# Altium PCB CH340C9T-R0.PcbDoc
Units mil, origin at the board's own origin, x right, y up, seen from the top; angles counter-clockwise.
Board outline 574.6 x 1292.24 mil, 2 copper layers (Top Layer, Bottom Layer); 12 components, 16 nets, 52 pads, 66 vias.
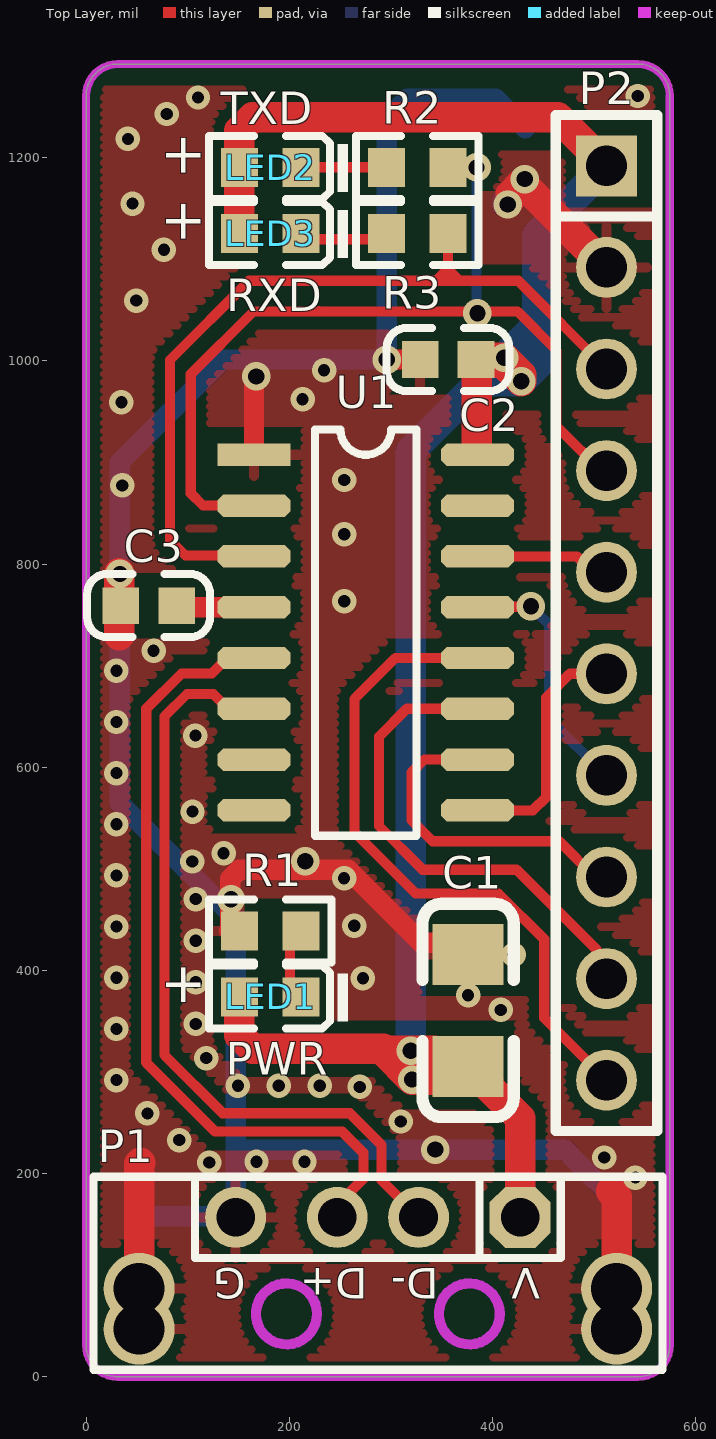
[diagram p0: Top Layer view]
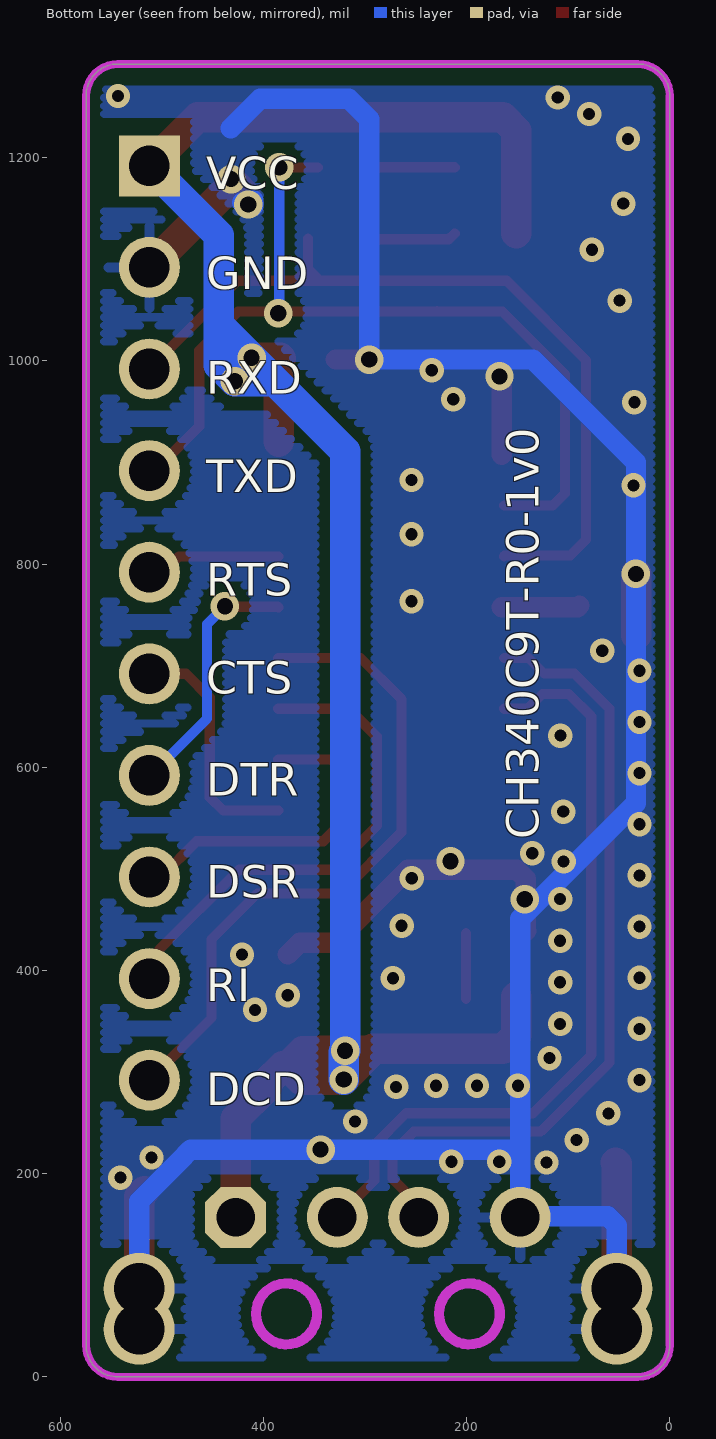
[diagram p1: Bottom Layer view, seen from below]

## Layer stack, top to bottom
Top Solder: solder mask 0.4, Solder Resist, Dk 3.5
Top Layer: signal copper 1.4
Dielectric 1: dielectric 12.6, FR-4, Dk 4.8
Bottom Layer: signal copper 1.4
Bottom Solder: solder mask 0.4, Solder Resist, Dk 3.5

## Board outline
0,31.5 0,1260.75 cw(c31.5,1260.75) 31.5,1292.24 543.11,1292.24 cw(c543.11,1260.75) 574.6,1260.75 574.6,31.5 cw(c543.11,31.5) 543.11,0 31.5,0 cw(c31.5,31.5)

## Design rules (kind name [scope] priority, off if disabled: settings)
Clearance Clearance_1 [InPolygon] p1: gap=10 ignorepadtopadclearanceinfootprint=FALSE
Clearance [All] p2: gap=8 ignorepadtopadclearanceinfootprint=FALSE
ComponentClearance [All] p1 off: gap=10 collisioncheckmode=3 verticalgap=10 showdistances=FALSE
MinimumSolderMaskSliver [All] p1 off: minsoldermaskwidth=10
PolygonConnect PolygonConnect_1 [IsVia] p1: connectstyle=Direct reliefconductorwidth=10 reliefentries=4 polygonreliefangle="90 Angle" airgapwidth=10
PolygonConnect [All] p2: connectstyle=Relief reliefconductorwidth=10 reliefentries=4 polygonreliefangle="90 Angle" airgapwidth=10
RoutingVias [All] p1: holewidth=28 width=50 viastyle="Through Hole" minholewidth=12 minwidth=24 maxholewidth=16 maxwidth=28
SilkToSilkClearance [All] p1 off: silktosilkclearance=10
SilkToSolderMaskClearance [IsPad] p1 off: minsilkscreentomaskgap=10 clearancetoexposedcopper=TRUE
SolderMaskExpansion [All] p1: expansion=4 istentingtop=FALSE
Width [All] p1: maxlimit=60 minlimit=8 preferedwidth=10
26 further rules are at their usual default settings.

## Components (designator, comment, footprint, x,y, rotation, side; value= is the part's Value field where it differs from the comment)
C1 "10uF" 3216_C 376.07,305.7 r270 top
C2 "0.1uF" 0603_C 383.83,1001.38 r180 top
C3 "0.1uF" 0603_C 34.11,759.23 r0 top
LED1 "PWR" 0603+ 151.01,374.03 r0 top
LED2 "TXD" 0603+ 151.01,1190.5 r0 top
LED3 "RXD" 0603+ 151.01,1125.5 r0 top
P1 "USB" USBAM 427.28,157.03 r180 top
P2 "Header 10H" SIP10-2.54mm 512.28,1192.03 r0 top
R1 "2K" 0603 211.64,439.03 r180 top
R2 "2K" 0603 295.64,1190.5 r0 top
R3 "2K" 0603 295.64,1125.5 r0 top
U1 "CH340C" SOP16 165.35,907.63 r270 top

## Footprints (in the part's own frame and the unit in brackets; to place one, negate y for a bottom-side part, rotate by r counter-clockwise, add the part's x,y. Pads: shape width x height; smd on the part's side, far side on the other; paste and mask are expansions set on the pad)
0603 [mm]
  rect 0.93x0.98 smd: 1(0,0) 2(1.54,0)
  silkscreen extent -0.76,-0.79 2.3,0.79
0603+ [mm]
  rect 0.93x0.98 smd: 1(0,0) 2(1.54,0)
  silkscreen extent -0.76,-0.79 2.72,0.79
0603_C [mil]
  rect 36x36 smd: 1(0,0) 2(55,0)
  silkscreen extent -33,-31 88,31
3216_C [mil]
  rect 60x70 smd: 1(0,0) 2(-110,0)
  silkscreen extent -160,-45 50,45
SIP10-2.54mm [mil]
  rect 60x60 hole 40: 1(0,0)
  round 60 hole 40: 2(0,-100) 3(0,-200) 4(0,-300) 5(0,-400) 6(0,-500) 7(0,-600) 8(0,-700) 9(0,-800) 10(0,-900)
  silkscreen extent -50,-950 50,50
SOP16 [mil]
  rect 22x72 smd: 1(0,0)
  oct 22x72 smd: 2(50,0) 3(100,0) 4(150,0) 5(200,0) 6(250,0) 7(300,0) 8(350,0) 9(350,220) 10(300,220) 11(250,220) 12(200,220) 13(150,220) 14(100,220) 15(50,220) 16(0,220)
  silkscreen extent -25,60 375,160
USBAM [mil]
  oct 60x60 hole 38: 1(0,0)
  round 60 hole 38: 2(100,0) 3(180,0) 4(280,0)
  round 70 hole 50: 5(-95,70) 5(-95,110) 6(375,70) 6(375,110)
  Keep-Out Layer circle w10: c230,95 r30
  Keep-Out Layer circle w10: c50,95 r30
  silkscreen extent -140,-40 420,150

## Part data
C1 C2 C3: library part CAP, "Capacitor"
LED1 LED2 LED3: library part LED2, "Typical RED, GREEN, YELLOW, AMBER GaAs LED"
P2: "Header, 10-Pin, Right Angle", LatestRevisionDate=17-Jul-2002, LatestRevisionNote="Re-released for DXP Platform.", Publisher="Altium Limited"
R1 R2 R3: library part Res2, "Resistor"
U1: "USB to TTL Serial / UART"

## Via types
v1: diameter 24, hole 12, Top Layer to Bottom Layer, 51 vias
v2: diameter 28, hole 16, Top Layer to Bottom Layer, 15 vias

## Nets (pads, with @x,y where several pads share a name; then routed paths per layer and width w, separated by ;. In a path a pad name is that pad's centre, name@x,y a point inside that pad or via, vN(x,y) a via of type N, cw(c..) or ccw(c..) an arc to the next point about the centre after c; other vN are vias at no path point)
CTS: P2.6 U1.9 | length 240
  Top Layer w10: U1.9 439.84,557.63 452.83,570.62 452.83,668.59 476.27,692.03 P2.6
DCD: P2.10 U1.12 | length 663.7
  Top Layer w10: U1.12 304.47,707.63 264.23,667.39 264.23,536.02 324.4,475.85 405.95,475.85 451.05,430.75 451.05,353.27 P2.10
DSR: P2.8 U1.10 | length 332.4
  Top Layer w10: U1.10 333.17,607.63 320.21,594.67 320.21,548.11 341.09,527.23 465.64,527.23 500.83,492.03 P2.8
DTR: P2.7 U1.13 | length 250.8
  Top Layer w10: U1.13 385.85,758.13 437.37,758.13 v2(437.87,758.63)
  Bottom Layer w10: v2(437.87,758.63) 455.57,740.93 455.57,647.91 511.44,592.03 P2.7
GND: C1.2 C2.2 C3.1 P1.4 P1.5 P1.6 P2.2 R1.2 U1.1 | length 3176.9
  Top Layer w20: C3.1@31.95,757.07 C3.1 33.73,759.61 33.73,789.96 v2(33.35,790.33) ; R1.2@141.01,439.03 141.87,439.89 141.87,490.36 150.65,499.15 258.06,499.15 329.85,427.35 364.41,427.35 C1.2 ; U1.1 165.35,980.3 167.64,982.58 v2(167.64,984.75) ; v2(295.9,1001.38) C2.2 ; v2@421,1155.96 416.52,1155.96 412.92,1152.36 412.92,1165.77 v2@425.73,1178.58
  Top Layer w30: 32.95,729.98 v2@32.95,791.07 ; P1.6@52.28,47.03 52.28,87.03 52.28,209.79 53.28,210.79 ; v2@431.84,1172.48 P2.2 ; 517.14,182.55 522.28,177.41 P1.5@522.28,87.03
  Bottom Layer w20: P1.6@52.28,47.03 52.28,87.03 52.28,149.12 61.22,158.06 146.26,158.06 P1.4 147.28,223.46 ; v2@409.86,1158.02 409.86,1152.36 413.46,1155.96 v2@421,1155.96 ; 432.3,1229.03 412.58,1248.75 403.21,1258.12 315.98,1258.12 295.9,1238.04 v2(295.9,1001.38) 134.61,1001.38 33.35,900.12 v2(33.35,790.33) 33.35,564.8 147.28,450.87 147.28,286.65 147.28,223.46 ; P1.5@522.28,47.03 522.28,87.03 522.28,172.95 482.75,212.48 471.77,223.46 343.73,223.46 147.28,223.46
  other v1: 540.75,196.2 121.33,211.11 167.81,211.83 215.01,211.83 510.13,215.98 91.78,233.09 309.71,251.43 60.43,259.39 269.43,285.45 149.53,286.65 189.76,286.65 229.98,286.65 29.89,292.18 118.42,313.85 29.89,342.54 107.96,347.48 408.25,361.29 376.07,375.7 107.96,388.41 272.55,392.44 29.89,392.89 421.07,415.7 107.96,429.34 29.89,443.25 264,444.09 107.96,470.27 254.02,490.76 29.89,493.6 104.51,507.31 135.39,515.34 29.89,543.95 104.86,556.42 29.89,594.31 107.65,631.27 29.89,644.66 29.89,695.02 66.52,714.77 254.19,763.54 254.19,829.37 35.75,877.5 254.19,882.79 34.84,959.34 213.2,962.29 234.32,990.86 49.39,1059.37 76.67,1109.39 45.75,1154.86 41.2,1218.51 79.4,1243.06 110.25,1259.23 543.11,1260.75
  other v2: 343.73,223.79 142.72,470.09 215.87,507.59 415,1153.96 431.84,1179.04
NetLED1_2: LED1.2 R1.1 | length 65
  Top Layer w10: LED1.2@200.64,372.03 R1.1@200.64,437.03
NetLED2_2: LED2.2 R2.1 | length 84.2
  Top Layer w10: LED2.2 211.85,1190.71 295.43,1190.71 R2.1
NetLED3_2: LED3.2 R3.1 | length 88.8
  Top Layer w10: LED3.2 217.43,1119.71 289.85,1119.71 R3.1
RI: P2.9 U1.11 | length 493.5
  Top Layer w10: U1.11 315.82,657.63 288.29,630.11 288.29,542.32 331.41,499.2 423.87,499.2 502.71,420.36 502.71,401.6 P2.9
RTS: P2.5 U1.14 | length 133.4
  Top Layer w10: U1.14 483.15,807.63 498.75,792.03 P2.5
RXD: P2.3 R3.2 U1.3 | length 832.8
  Top Layer w10: U1.3@163.35,807.63 162.49,808.49 97.93,808.49 82.65,823.77 82.65,1000.95 160.54,1078.85 344.45,1078.85 ; 356.27,1082.86 356.27,1090.15 ; R3.2@356.27,1120.5 356.27,1090.66 ; P2.3 425.47,1078.85 367.57,1078.85 ; 344.45,1078.85 357.57,1078.85 367.57,1078.85 ; 344.45,1078.85 356.27,1090.66 ; 356.27,1090.15 356.27,1090.66 ; 356.27,1090.15 367.57,1078.85
TXD: P2.4 R2.2 U1.2 | length 908.8
  Top Layer w10: U1.2@163.35,857.63 115.21,857.63 103.16,869.68 103.16,986.92 164.85,1048.6 228.85,1048.6 229.28,1049.03 229.71,1048.6 424.79,1048.6 463.12,1010.28 463.12,935.76 P2.4@509.56,889.31 ; R2.2@346.27,1190.5 R2.2 v2(384.39,1190.5)
  Bottom Layer w10: v2@382.42,1047.03 v2@384.39,1047.03 ; v2(384.39,1190.5) v2@384.39,1047.03 ; v2(385.28,1047.03) v2@384.39,1047.03
UD+: P1.3 U1.5 | length 797.7
  Top Layer w10: U1.5@163.35,707.63 139.01,707.63 123.77,692.38 94.08,692.38 59.32,657.63 59.32,309.32 127.17,241.47 252.17,241.47 272.96,220.68 272.96,195.03 247.28,169.35 P1.3
UD-: P1.2 U1.6 | length 771.1
  Top Layer w10: U1.6@163.35,657.63 139.84,657.63 125.24,672.23 99.38,672.23 77.32,650.17 77.32,316.78 134.63,259.47 259.63,259.47 290.96,228.14 290.96,193.36 P1.2
V3: C3.2 U1.4 | length 76.9
  Top Layer w20: C3.2 90.71,757.63 U1.4
VCC: C1.1 C2.1 LED1.1 LED2.1 LED3.1 P1.1 P2.1 U1.16 | length 2445.2
  Top Layer w30: LED1.1 151.01,336.27 164.19,323.09 292.55,323.09 ; LED3.1 151.01,1226.65 164.19,1239.83 464.48,1239.83 P2.1 ; C1.1@381.07,305.7 396.07,290.7 396.07,285.7 427.28,254.49 P1.1 ; C2.1@383.46,1003.01 382.83,1002.38 C2.1 ; 384.82,920.59 C2.1@384.82,1000.39 ; v2(319.66,321.09) 342.89,321.09 343.28,320.7 361.07,320.7 C1.1 363.08,292.71 v2(320.93,292.71) ; v2(319.66,321.09) 320.93,319.82 v2(320.93,292.71) ; v2(319.66,321.09) 292.55,321.09 v2(320.93,292.71) ; C2.1 C2.1@384.82,1000.39 ; C2.1 385.46,1003.01 v2(411.67,1003.01) 428.28,986.4 v2(428.28,980.03) 409.93,998.38 386.83,998.38 C2.1@384.82,1000.39
  Bottom Layer w30: v2(320.93,292.71) 320.93,319.82 v2(319.66,321.09) 319.66,911 388.69,980.03 ; 443.95,1076.57 443.95,1035.3 ; P2.1 443.95,1123.71 443.95,1035.3 ; 388.69,980.03 v2(411.67,1003.01) ; 388.69,980.03 v2(428.28,980.03) ; v2(411.67,1003.01) 428.3,1019.65 ; v2(411.67,1003.01) 428.28,986.4 v2(428.28,980.03) ; v2(428.28,980.03) 443.95,995.71 443.95,1035.3 ; v2(428.28,980.03) 428.3,1019.65 ; 428.3,1019.65 443.95,1035.3
pads on no net: U1.7 U1.8 U1.15

## Polygon pours and split planes (outlines as drawn)
GND on Bottom Layer "GND_L01_P-001" (hatched Horizontal grid 8 track 8, remove dead copper, pour order 1): -2.28,1292.83 -2.28,-0.73 -0.81,-2.21 0.81,-0.59 576.78,-0.59 576.78,1293.58 575.16,1295.19
GND on Top Layer "GND_L01_P-001" (hatched Horizontal grid 8 track 8, remove dead copper, pour order 0): -3.75,1294.3 -0.81,1291.36 -0.81,-2.21 578.39,-2.21 575.16,1.02 575.16,1295.19

## Keep-outs
Keep-Out Layer:
  the board outline again, w8

## Silkscreen, mask and mechanical layers (free items; w line width, h text height)
Bottom Overlay:
  text "VCC" at 456.4,1169.03 h32
  text "GND" at 456.4,1070.74 h32
  text "RXD" at 456.4,967.7 h32
  text "TXD" at 456.4,870.99 h32
  text "RTS" at 456.4,768.93 h32
  text "CTS" at 456.4,672.43 h32
  text "DTR" at 456.4,571.91 h32
  text "CH340C9T-R0-1v0" at 129.16,529.09 h32 r270
  text "DSR" at 456.4,471.86 h32
  text "RI" at 456.4,370.01 h32
  text "DCD" at 456.4,267.47 h32
Mechanical 1:
  the board outline again, w8

## Text inside footprints (layer, text, board x,y; h text height)
LED1: Top Overlay "+" at 112.94,363.05 h40 r90
LED2: Top Overlay "+" at 112.94,1179.51 h40 r90
LED3: Top Overlay "+" at 112.94,1114.51 h40 r90
P1: Top Overlay "G" at 157.28,107.03 h30 r180; Top Overlay "V" at 447.28,107.03 h30 r180; Top Overlay "D+" at 277.28,107.03 h30 r180; Top Overlay "D-" at 347.28,107.03 h30 r180